# Altium PCB callisto_board.PcbDoc
Units mm, origin at the board's own origin, x right, y up, seen from the top; angles counter-clockwise.
Board outline 152.4 x 101.6 mm, 2 copper layers (Top Layer, Bottom Layer); 126 components, 72 nets, 360 pads, 0 vias.
Unrouted connection lines stored in the file: 262.
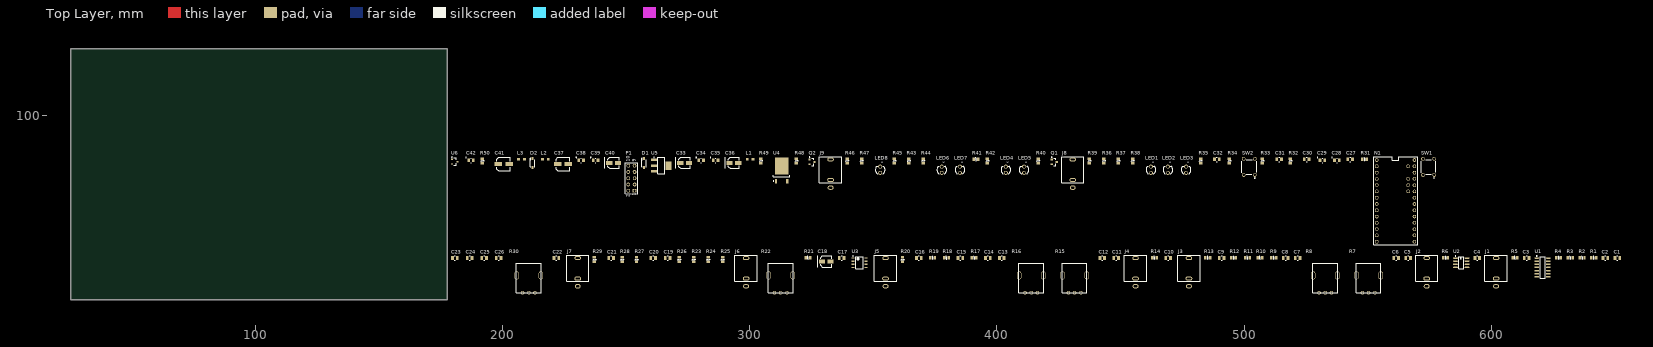
[diagram p0: Top Layer view]
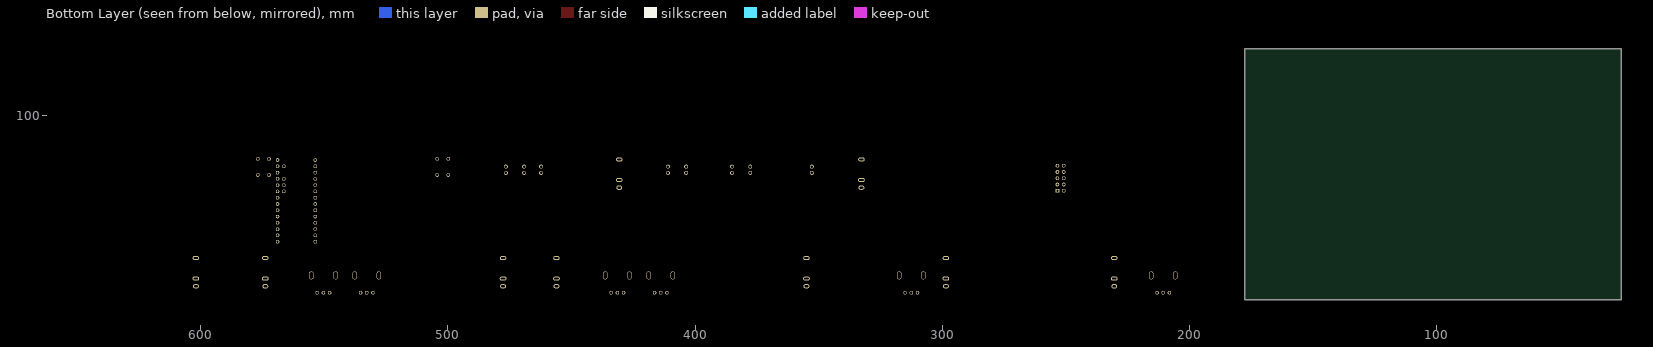
[diagram p1: Bottom Layer view, seen from below]

## Layer stack, top to bottom
Top Solder: solder mask 0.0102, Solder Resist, Dk 3.5
Top Layer: signal copper 0.0356
Dielectric 1: dielectric 0.32, FR-4, Dk 4.8
Bottom Layer: signal copper 0.0356
Bottom Solder: solder mask 0.0102, Solder Resist, Dk 3.5

## Board outline
25.4,25.4 177.8,25.4 177.8,127 25.4,127

## Design rules (kind name [scope] priority, off if disabled: settings)
BoardOutlineClearance [All] p1: gap=0.254 ignorepadtopadclearanceinfootprint=FALSE except(0: Arc-SplitContinuation Track-SplitContinuation SMDPad-SplitContinuation THPad-SplitContinuation Via-SplitContinuation Fill-SplitContinuation Poly-SplitContinuation Region-SplitContinuation Text-SplitContinuation)
Clearance [All] p1: gap=0.18 ignorepadtopadclearanceinfootprint=FALSE
ComponentClearance [All] p1 off: gap=0.254 collisioncheckmode=3 verticalgap=0.254 showdistances=FALSE
HoleSize [All] p1: absolutevalues=TRUE maxlimit=6.3 minlimit=0.3 maxpercent=80.000 minpercent=20.000
MinimumAnnularRing [All] p1: minimumring=0.15
MinimumSolderMaskSliver [All] p1: minsoldermaskwidth=0.15
PlaneConnect [All] p1: planeconnectstyle=Direct reliefexpansion=0.508 reliefentries=4 reliefconductorwidth=0.254 reliefairgap=0.254
PolygonConnect [All] p1: connectstyle=Direct reliefconductorwidth=0.254 reliefentries=4 polygonreliefangle="90 Angle" airgapwidth=0.254
RoomDefinition callisto_schematics_digital [InComponentClass('callisto_schematics_digital')] p1: confinementstyle=ConfineIn formatcopy=TRUE lockcomponents=FALSE outline 178.943,47.371 577.85,47.371 577.85,85.979 178.943,85.979
RoomDefinition callisto_schematics_analog [InComponentClass('callisto_schematics_analog')] p2: confinementstyle=ConfineIn formatcopy=TRUE lockcomponents=FALSE outline 178.943,26.924 652.78,26.924 652.78,46.101 178.943,46.101
RoutingVias [All] p1: holewidth=0.3 width=0.6 viastyle="Through Hole" minholewidth=0.3 minwidth=0.6 maxholewidth=0.3 maxwidth=0.6
SilkToSilkClearance [All] p1 off: silktosilkclearance=0.254
SilkToSolderMaskClearance [IsPad] p1 off: minsilkscreentomaskgap=0.254 clearancetoexposedcopper=TRUE
SolderMaskExpansion [All] p1: expansion=0.102
UnConnectedPin [All] p1:
Width [All] p1: maxlimit=1 minlimit=0.15 preferedwidth=0.254
24 further rules are at their usual default settings.

## Classes and differential pairs
component class callisto_schematics_digital: C27 C28 C29 C30 C31 C32 C33 C34 C35 C36 C37 C38 C39 C40 C41 C42 D1 D2 J8 J9 L1 L2 L3 LED1 LED2 LED3 LED4 LED5 LED6 LED7 LED8 N1 P1 Q1 Q2 R31 R32 R33 R34 R35 R36 R37 R38 R39 R40 R41 R42 R43 R44 R45 R46 R47 R48 R49 R50 SW1 SW2 U4 U5 U6
component class callisto_schematics_analog: C1 C2 C3 C4 C5 C6 C7 C8 C9 C10 C11 C12 C13 C14 C15 C16 C17 C18 C19 C20 C21 C22 C23 C24 C25 C26 J1 J2 J3 J4 J5 J6 J7 R1 R2 R3 R4 R5 R6 R7 R8 R9 R10 R11 R12 R13 R14 R15 R16 R17 R18 R19 R20 R21 R22 R23 R24 R25 R26 R27 R28 R29 R30 U1 U2 U3

## Components (designator, comment, footprint, x,y, rotation, side; value= is the part's Value field where it differs from the comment)
C1 "20pF" CAPA_0805 650.875,42.291 r0 top
C2 "20pF" CAPA_0805 646.049,42.291 r0 top
C3 "100nF" CAPA_0805 614.172,42.291 r0 top
C4 "100nF" CAPA_0805 594.233,42.291 r0 top
C5 "20pF" CAPA_0805 566.293,42.291 r0 top
C6 "20pF" CAPA_0805 561.467,42.291 r0 top
C7 "20pF" CAPA_0805 521.589,42.291 r0 top
C8 "20pF" CAPA_0805 516.763,42.291 r0 top
C9 "100nF" CAPA_0805 490.855,42.291 r0 top
C10 "100nF" CAPA_0805 469.265,42.291 r0 top
C11 "20pF" CAPA_0805 448.183,42.291 r0 top
C12 "20pF" CAPA_0805 442.595,42.291 r0 top
C13 "20pF" CAPA_0805 401.955,42.291 r0 top
C14 "20pF" CAPA_0805 396.367,42.291 r0 top
C15 "1nF" CAPA_0805 385.191,42.291 r0 top
C16 "100nF" CAPA_0805 368.427,42.291 r0 top
C17 "20pF" CAPA_0805 337.185,42.291 r0 top
C18 "EEE-FK1V100UR" PNSC-FK-V-B_V 330.962,40.894 r0 top
C19 "1nF" CAPA_0805 266.827,42.291 r0 top
C20 "20pF" CAPA_0805 260.985,42.291 r0 top
C21 "100nF" CAPA_0805 243.967,42.291 r0 top
C22 "20pF" CAPA_0805 221.869,42.291 r0 top
C23 "100nF" CAPA_0805 180.848,42.291 r0 top
C24 "100nF" CAPA_0805 186.817,42.291 r0 top
C25 "100nF" CAPA_0805 192.659,42.291 r0 top
C26 "100nF" CAPA_0805 198.501,42.291 r0 top
C27 "100nF" CAPA_0805 542.798,82.169 r0 top
C28 "1uF" "CAPA_0805 Pol" 537.464,81.788 r0 top
C29 "1uF" "CAPA_0805 Pol" 531.622,81.788 r0 top
C30 "100nF" CAPA_0805 525.272,82.169 r0 top
C31 "100nF" CAPA_0805 514.096,82.169 r0 top
C32 "100nF" CAPA_0805 488.95,82.169 r0 top
C33 "EEE-FK1V100UR" PNSC-FK-V-B_V 273.685,80.772 r0 top
C34 "1uF" "CAPA_0805 Pol" 280.416,81.788 r0 top
C35 "1uF" "CAPA_0805 Pol" 286.258,81.788 r0 top
C36 "EEE-FK1V100UR" PNSC-FK-V-B_V 293.624,80.772 r0 top
C37 "UUD1C220MCL1GS" NIC-CAPA2-5X5.8_V 224.536,80.264 r0 top
C38 "1uF" "CAPA_0805 Pol" 231.902,81.788 r0 top
C39 "1uF" "CAPA_0805 Pol" 237.744,81.788 r0 top
C40 "EEE-FK1V100UR" PNSC-FK-V-B_V 244.983,80.772 r0 top
C41 "UUD1C220MCL1GS" NIC-CAPA2-5X5.8_V 200.533,80.264 r0 top
C42 "1uF" "CAPA_0805 Pol" 187.325,81.788 r0 top
D1 "1N5819HW-7-F" DIOD-SOD-123-2_V 257.302,80.645 r90 top
D2 "1N5819HW-7-F" DIOD-SOD-123-2_V 212.217,80.645 r90 top
J1 "Phonejack2 TN" Thonkiconn 601.853,37.338 r0 top
J2 "Phonejack2 TN" Thonkiconn 573.786,37.338 r0 top
J3 "Phonejack2 TN" Thonkiconn 477.647,37.338 r0 top
J4 "Phonejack2 TN" Thonkiconn 456.057,37.338 r0 top
J5 "Phonejack2 TN" Thonkiconn 354.965,37.338 r0 top
J6 "Phonejack2 TN" Thonkiconn 298.577,37.338 r0 top
J7 "Phonejack2 TN" Thonkiconn 230.505,37.338 r0 top
J8 "Phonejack2 TN" Thonkiconn 430.657,77.216 r0 top
J9 "Phonejack2 TN" Thonkiconn 332.74,77.216 r0 top
L1 "742792011" SMD-0805 300.228,82.296 r0 top
L2 "742792011" SMD-0805 217.424,82.296 r0 top
L3 "742792011" SMD-0805 207.772,82.296 r0 top
LED1 "WP424YDT" "Type 3mm" 462.28,77.978 r90 top
LED2 "WP424YDT" "Type 3mm" 469.138,77.978 r90 top
LED3 "WP424YDT" "Type 3mm" 476.504,77.978 r90 top
LED4 "WP424YDT" "Type 3mm" 403.606,77.978 r90 top
LED5 "WP424YDT" "Type 3mm" 410.972,77.978 r90 top
LED6 "WP424YDT" "Type 3mm" 377.698,77.978 r90 top
LED7 "WP424YDT" "Type 3mm" 385.064,77.978 r90 top
LED8 "WP424YDT" "Type 3mm" 352.806,77.978 r90 top
N1 "Teensy 3.2" TEENSY_3.0-3.2&LC_DIL+4 561.213,65.405 r0 top
P1 "Header 5X2" HDR2X5 253.492,69.469 r90 top
Q1 "MMBT3904LT1G" ONSC-SOT-23-3-318-08_V 423.164,81.153 r0 top
Q2 "MMBT3904LT1G" ONSC-SOT-23-3-318-08_V 325.247,81.153 r0 top
R1 "33k" RES_0805 641.35,42.418 r0 top
R2 "33k" RES_0805 636.651,42.418 r0 top
R3 "140k" RES_0805 631.825,42.418 r0 top
R4 "200k" RES_0805 627.126,42.418 r0 top
R5 "100k" RES_0805 609.473,42.418 r0 top
R6 "100k" RES_0805 581.406,42.418 r0 top
R7 "Potentiometer" POT-ALPHA 550.291,31.75 r0 top
R8 "Potentiometer" POT-ALPHA 532.765,31.75 r0 top
R9 "33k" RES_0805 511.937,42.418 r0 top
R10 "33k" RES_0805 506.349,42.418 r0 top
R11 "200k" RES_0805 501.269,42.418 r0 top
R12 "200k" RES_0805 495.681,42.418 r0 top
R13 "100k" RES_0805 485.267,42.418 r0 top
R14 "100k" RES_0805 463.677,42.418 r0 top
R15 "Potentiometer" POT-ALPHA 431.419,31.75 r0 top
R16 "Potentiometer" POT-ALPHA 413.893,31.75 r0 top
R17 "33k" RES_0805 390.779,42.418 r0 top
R18 "200k" RES_0805 379.603,42.418 r0 top
R19 "47k" RES_0805 374.015,42.418 r0 top
R20 "100k" RES_0805 361.823,41.656 r90 top
R21 "6k2" RES_0805 323.596,42.418 r0 top
R22 "Potentiometer" POT-ALPHA 312.547,31.75 r0 top
R23 "6k2" RES_0805 277.368,41.656 r90 top
R24 "6k2" RES_0805 283.21,41.656 r90 top
R25 "1k" RES_0805 289.052,41.656 r90 top
R26 "47k" RES_0805 271.526,41.656 r90 top
R27 "33k" RES_0805 254.254,41.656 r90 top
R28 "200k" RES_0805 248.412,41.656 r90 top
R29 "100k" RES_0805 237.236,41.656 r90 top
R30 "Potentiometer" POT-ALPHA 210.693,31.75 r0 top
R31 "120R" RES_0805 548.64,82.296 r0 top
R32 "0R" RES_0805 518.668,81.534 r90 top
R33 "0R" RES_0805 507.365,81.534 r90 top
R34 "120R" RES_0805 494.03,81.534 r90 top
R35 "10k" RES_0805 482.346,81.534 r90 top
R36 "120R" RES_0805 443.23,81.534 r90 top
R37 "120R" RES_0805 449.072,81.534 r90 top
R38 "120R" RES_0805 454.914,81.534 r90 top
R39 "100k" RES_0805 437.388,81.534 r90 top
R40 "1M" RES_0805 416.687,81.534 r90 top
R41 "120R" RES_0805 391.541,82.296 r0 top
R42 "120R" RES_0805 396.113,81.534 r90 top
R43 "120R" RES_0805 364.363,81.534 r90 top
R44 "120R" RES_0805 370.205,81.534 r90 top
R45 "10k" RES_0805 358.521,81.534 r90 top
R46 "100k" RES_0805 339.471,81.534 r90 top
R47 "120R" RES_0805 345.313,81.534 r90 top
R48 "1M" RES_0805 318.897,81.534 r90 top
R49 "0R" RES_0805 304.546,81.534 r90 top
R50 "2k2" RES_0805 191.897,81.534 r90 top
SW1 "TL1105SPF160Q" ESWI-TL1105SPF_V 574.548,79.121 r90 top
SW2 "TL1105SPF160Q" ESWI-TL1105SPF_V 502.031,79.121 r90 top
U1 "MCP6004-E/SL" SOIC-SL14_L 620.649,38.481 r0 top
U2 "MCP6002-E/SN" SOIC-SN8_L 587.756,40.386 r0 top
U3 "TL072ACD" D0008A_L 344.424,40.386 r0 top
U4 "LM1117DTX-3.3" TD03B_N 312.928,77.724 r90 top
U5 "LM1117MP-5.0" MP04A_N 264.287,79.629 r0 top
U6 "LM4040B10IDBZT" DBZ0003A_L 180.721,81.28 r0 top

## Footprints (in the part's own frame and the unit in brackets; to place one, negate y for a bottom-side part, rotate by r counter-clockwise, add the part's x,y. Pads: shape width x height; smd on the part's side, far side on the other; paste and mask are expansions set on the pad)
CAPA_0805 [mm]
  rect 1.1x1.45 smd: 1(-0.95,0) 2(0.95,0)
  silkscreen extent -0.2,-0.9 0.2,0.9, body extent -1.1,-0.72 1.1,0.72, height 0.5
"CAPA_0805 Pol" [mm]
  rect 1.1x1.45 smd: 1(-0.95,0) 2(0.95,0)
  silkscreen extent -2.12,-0.9 0.1,1.32, body extent -1.1,-0.72 1.1,0.72, height 0.5
D0008A_L [mm] "SOIC, 8-Leads, Body 5x4mm, Pitch 1.27mm, IPC High Density"
  rrect18% 1.25x0.55 smd: 1(-2.625,1.905) 2(-2.625,0.635) 3(-2.625,-0.635) 4(-2.625,-1.905) 5(2.625,-1.905) 6(2.625,-0.635) 7(2.625,0.635) 8(2.625,1.905)
  silkscreen extent -2.75,-2.5 1.6,2.85, body extent -3,-2.45 3,2.45, height 1.63
DBZ0003A_L [mm] "SOT23, 3-Leads, Body 3.04x1.4mm, Pitch 0.95mm, IPC High Density"
  rrect18% 0.8x0.55 smd: 1(-1.1,0.95) 2(-1.1,-0.95) 3(1.1,0)
  silkscreen extent -1.22,-1.5 0.7,1.9, body extent -1.26,-1.46 1.26,1.46, height 0.96
DIOD-SOD-123-2_V [mm] "SOD-123, 2-Leads, Body 2.85x1.7mm (max), Pitch 3.7mm"
  rect 1.2x0.7 smd: 1(-1.85,0) 2(1.85,0)
  silkscreen extent -1.43,-0.85 1.97,1.02, body extent -1.42,-0.85 1.43,0.85, height 1.45
ESWI-TL1105SPF_V [mm] "THD, 4-Leads, Body 6x6mm"
  round 1.5 hole 1: 1(-3.25,-2.25) 2(3.25,-2.25) 3(-3.25,2.25) 4(3.25,2.25)
  silkscreen extent -4.67,-3 3,3, body extent -3.95,-3 3.95,3, height 7.4
HDR2X5 [mm] "Connector; Header; 5x2 Position"
  rect 1.5x1.5 hole 0.9: 1(0,0)
  round 1.5 hole 0.9: 2(0,2.54) 3(2.54,0) 4(2.54,2.54) 5(5.08,0) 6(5.08,2.54) 7(7.62,0) 8(7.62,2.54) 9(10.16,0) 10(10.16,2.54)
  silkscreen extent -1.27,-1.27 11.43,3.81
MP04A_N [mm] "SOT223, 4-Leads, Body 6.5x3.5mm, Pitch 2.3mm, Lead Span 7mm, IPC Medium Density"
  rect 2.4x1 smd: 1(-2.9,2.3) 2(-2.9,0) 3(-2.9,-2.3)
  rect 2.4x3.3 smd: 4(2.9,0)
  silkscreen extent -3.02,-3.35 1.4,3.47, body extent -1.86,-3.35 1.86,3.35, height 1.8
NIC-CAPA2-5X5.8_V [mm] "Aluminum Electrolytic Capacitor, Diameter 5mm, Height 6.1mm, Pitch 4.4mm"
  rect 3x1.6 smd: 1(-2.2,0) 2(2.2,0)
  silkscreen extent -2.75,-2.75 2.75,2.75, body extent -2.5,-2.48 2.49,2.5, height 6.1
ONSC-SOT-23-3-318-08_V [mm] "SOT23, 3-Leads, Body 2.92x1.3mm, Pitch 0.95mm"
  rect 0.9x0.8 smd: 1(-1,0.95) 2(-1,-0.95) 3(1,0)
  silkscreen extent -1.12,-1.46 0.65,2.02, body extent -0.65,-1.46 0.65,1.46, height 1.11
PNSC-FK-V-B_V [mm] "CAPAE, 2-Leads, Body 4.50x4.50mm"
  rect 2.5x1.6 smd: 1(-1.75,0) 2(1.75,0)
  silkscreen extent -3.5,-2.25 2.25,2.25, body extent -2.75,-2.25 2.75,2.25, height 6.1
POT-ALPHA [mm] "POT-ALPHA"
  round 1.422 hole 0.9: 1(-2.5,-3.5) 2(0,-3.5) 3(2.5,-3.5)
  oval 1.8x3.2 hole 1.2 slot 2.6 at 90 deg: P$1(-4.9,3.5) P$2(4.9,3.5)
  silkscreen extent -5,-3.5 5,8.5, body extent -5.7,-3.55 5.7,9.1, height 25.3
RES_0805 [mm] "0805 Chip Resistor, 2-Leads, Body 2.05x1.25mm, IPC Medium Density"
  rect 1x1.4 smd: 1(-0.95,0) 2(0.95,0)
  silkscreen extent -0.2,-0.7 0.2,0.7, body extent -1.1,-0.7 1.1,0.7, height 0.5
SMD-0805 [mm] "Chip Inductor, 2-Leads, Body 2.0x1.2mm"
  rect 1.15x1 smd: 1(-1.175,0) 2(1.175,0)
  body extent -1,-0.6 1,0.6, height 0.89
SOIC-SL14_L [mm] "SOIC, 14-Leads, Body 8.7x3.9mm, Pitch 1.27mm, IPC High Density"
  oval 1.9x0.6 smd: 1(-2.35,3.81) 2(-2.35,2.54) 3(-2.35,1.27) 4(-2.35,0) 5(-2.35,-1.27) 6(-2.35,-2.54) 7(-2.35,-3.81) 8(2.35,-3.81) 9(2.35,-2.54) 10(2.35,-1.27) 11(2.35,0) 12(2.35,1.27) 13(2.35,2.54) 14(2.35,3.81)
  silkscreen extent -2.47,-4.4 1,4.78, body extent -2,-4.38 2,4.38, height 1.75
SOIC-SN8_L [mm] "SOIC, 8-Leads, Body 4.9x3.9mm, Pitch 1.27mm, IPC High Density"
  oval 1.9x0.6 smd: 1(-2.35,1.905) 2(-2.35,0.635) 3(-2.35,-0.635) 4(-2.35,-1.905) 5(2.35,-1.905) 6(2.35,-0.635) 7(2.35,0.635) 8(2.35,1.905)
  silkscreen extent -2.47,-2.5 1,2.88, body extent -2,-2.5 2,2.5, height 1.75
TD03B_N [mm] "D-PAK, 4-Leads, Body 6.1x6.6mm, Pitch 2.29mm, Lead Span 9.7mm, IPC Medium Density"
  rect 1.9x0.95 smd: 1(-4.35,2.28) 3(-4.35,-2.28)
  rect 6.9x5.5 smd: 4(1.85,0)
  silkscreen extent -4.47,-3.35 -2,3.43, body extent -2.5,-3.35 3.7,3.35, height 2.38
TEENSY_3.0-3.2&LC_DIL+4 [mil]
  round 57 hole 38: 0(-300,550) 1(-300,450) 2(-300,350) 3(-300,250) 3.3V(300,450) 4(-300,150) 5(-300,50) 6(-300,-50) 7(-300,-150) 8(-300,-250) 9(-300,-350) 10(-300,-450) 11(-300,-550) 12(-300,-650) 13(300,-650) 14/A0(300,-550) 15/A1(300,-450) 16/A2(300,-350) 17/A3(300,-250) 18/A4(300,-150) 19/A5(300,-50) 20/A6(300,50) 21/A7(300,150) 22/A8(300,250) 23/A9(300,350) A10(200,250) A11(200,150) AGND(300,550) AREF(200,350) GND(-300,650) VIN(300,650) VUSB(200,550)
  silkscreen extent -350,-700 350,700
Thonkiconn [mm] "Thonkiconn (PJ301M-12) 3.5mm Mono Jack"
  round 0 hole 3 unplated: 0(0,0)
  oval 2.6x1.6 hole 0.6 slot 1.6 at 0 deg: 1(0,4.92)
  oval 2.7x1.7 hole 0.7 slot 1.7 at 0 deg: 2(0,-3.38)
  oval 2.4x1.7 hole 0.7 slot 1.4 at 0 deg: 5(0,-6.48)
  silkscreen extent -4.5,-4.5 4.5,5.99, body extent -4.5,-6.63 4.5,6, height 14.5
"Type 3mm" [mm] "THT, LED-3mm, 2pin- Body 4.15mm(max)"
  round 1.6 hole 1: 1(1.27,0) 2(-1.27,0)
  silkscreen extent -1.66,-1.95 1.4,1.95, body extent -1.93,-1.94 1.87,1.94, height 10.5

## Part data
C1 C2 C3 C4 C5 C6 C7 C8 C9 C10 C11 C12 C13 C14 C15 C16 C17 C19 C20 C21 C22 C23 C24 C25 C26 C27 C30 C31 C32: library part Cap, "Capacitor", LatestRevisionDate=17-Jul-2002, LatestRevisionNote="Re-released for DXP Platform.", PackageDescription="Radial Cap, Thru-Hole; 2 Leads; 0.3 in Pin Spacing", PackageReference=RAD-0.3, Published=8-Jun-2000, Publisher="Altium Limited"
C18 C33 C36 C40: library part CMP-2000-06211-1, "Aluminum Electrolytic Capacitor, 10 uF, +/- 20%, 35 V, 2-Pin SMD (Size Code B), -55 to 105 degC, RoHS, Tape and Reel", Capacitance=10µF, Case Size/Dimension=Ø4x5.8mm, Lifetime@Temperature=2000Hrs@105°C, Manufacturer=Panasonic, Operating Temp-Max=105°C, Operating Temp Range=-55to+105°C, Package Description="2-Pin Electrolytic Aluminum Capacitor, Body 4.3 x 4.3 mm", Package Reference=FK-V-B, Rated Voltage=35V, Ripple Current=90mA, Datasheet URL=http://industrial.panasonic.com/cdbs/www-data/pdf/RDE0000/ABA0000C1181.pdf, Datasheet Version=03/2016, Impedance=1.35O, Manufacturer URL=http://www.panasonic.com/, Mounting Technology=SurfaceMount, Package URL=http://industrial.panasonic.com/cdbs/www-data/pdf/RDE0000/DME0000COL48.pdf, Series=FK, Type=Can
C28 C29 C34 C35 C38 C39 C42: library part "Cap Pol2", "Polarized Capacitor", Manufacturer="Murata Electronics", PartNumber=GRM21BR61C105KA01L, Mouser=http://www.mouser.de/ProductDetail/Murata-Electronics/GRM21BR61C105KA01L/?qs=sGAEpiMZZMs0AnBnWHyRQHqtMhGnfkOVy3Os4ZS1iuU%3d
C37 C41: library part CMP-0687-00027-1, "Aluminum Electrolytic Capacitor, UD Series, Low Impedance, 22 uF, 16 V, + / - 20%, -55 to 105 degC, Chip Type, 5 x 5.8 mm D x L, Pb-Free, Reel", Manufacturer=Nichicon, Rated Capacitance="22 uF", Rated Ripple Current (at 100kHz)="150 mA", Rated Voltage="16 V", Tolerance Rated Capacitance="-20 to 20%", ComponentLink1Description="Manufacturer URL", ComponentLink1URL=http://www.nichicon.co.jp/, ComponentLink2Description=Datasheet, ComponentLink2URL=http://products.nichicon.co.jp/en/pdf/XJA043/e-ud.pdf, ComponentLink3Description="Package Specification", ComponentLink3URL=http://products.nichicon.co.jp/en/pdf/XJA043/e-ud.pdf, DatasheetVersion=08/2012, Diameter="5 mm", Endurance Time="2000 h", Impedance="0.76 Ohm", Length="5.8 mm", Mounting Technology="Surface Mount", PackageDescription="2-Pin Surface Mount Device, Diameter 5 mm, Height 5.8 mm, Pitch 4.4 mm", PackageReference=CAPAE-D5H5.8, Packing="Dia382mm Reel", PartNumber=UUD1C220MCL1GS, RoHS=TRUE
D1 D2: library part CMP-0303-00003-1, "1.0 A Surface Mount Schottky Barrier Rectifier, 40 V, -65 to 125 degC, 2-Pin SOD-123 Package, RoHS, Tape and Reel", @ Terminal Temperature TT (degC)=90, Forward Voltage Drop VF (V)=0.45, Manufacturer="Diodes Inc", Maximum Average Rectified Current IO (A)=1, Maximum Reverse Current IR (uA)=50, Operating and Storage Temperature Range="-65 to 125 degC", Peak Forward Surge Current IFSM (A)=25, Peak Repetitive Reverse Voltage VRRM (V)=40, @ IF (A)=1, @ VR (V)=40, ComponentLink1Description="Manufacturer URL", ComponentLink1URL=http://www.diodes.com/, ComponentLink2Description=Datasheet, ComponentLink2URL=http://www.diodes.com/datasheets/ds30217.pdf, DatasheetVersion="Rev. 15-2", Mounting Technology="Surface Mount", PackageDescription="2-Pin SOD-123, Body 2.7 x 1.55 mm, Pitch 3.7 mm", PackageReference=SOD-123-2, Packing="Tape and Reel", PartNumber=1N5819HW-7-F, RoHS=TRUE, Total Capacitance CT (pF)=50, VR (RMS) (V)=28
J1 J2 J3 J4 J5 J6 J7 J8 J9: "Jack Socket", Manufacturer="Amphenol Audio", Datasheet=http://www.amphenolaudio.com/wp-content/uploads/2015/07/55010544-001-rev-2.pdf, Mouser=http://www.mouser.de/ProductDetail/Amphenol/ACJM-MV35-2S/?qs=%2fha2pyFaduh8uNgKuHZ7oEtHXwcSE0WAH4R1pjDPuhAHZsUXTeJRNg%3d%3d, Part=ACJM-MV35-2S, Thonk=https://www.thonk.co.uk/shop/3-5mm-jacks/
L1 L2 L3: library part CMP-0220-00043-1, "SMD EMI Suppression Ferrite Bead WE-CBF, Z = 10 Ohm", ComponentLink1Description="Manufacturer Link", ComponentLink1URL=http://www.we-online.com, ComponentLink2Description=Datasheet, ComponentLink2URL=http://www.we-online.de/katalog/media/pdf/742792011.pdf, DatasheetVersion=Dec-2005, Impedance="10 Ohm", PackageDescription="Chip Inductor, 2-Leads, Body 2.0 x 1.2 mm", PackageReference=SMD-0805, PackageVersion=2005
LED1 LED2 LED3 LED4 LED5 LED6 LED7 LED8: library part CMP-1488-00001-1, "THT LED round mono-color color lens, WL-TMRC, Bright Green", Emitting color="Bright Green", Manufacturer=Kingbright, ComponentLink1Description="Manufacturer URL", ComponentLink1URL=http://www.we-online.com, ComponentLink2Description=Datasheet, ComponentLink2URL=http://katalog.we-online.de/pbs/datasheet/7448042001.pdfhttp://katalog.we-online.de/pbs/datasheet/7448042001.pdfhttp://katalog.we-online.de/pbs/datasheet/7448042001.pdfhttp://katalog.we-online.de/pbs/datasheet/151031VS04000.pdf, PackageReference="Type 3mm", PartNumber=WP424YDT
N1: library part TEENSY_3.1-3.2_ALL_PINS, Manufacturer=SparkFun, PartNumber=DEV-13736, Mouser=http://www.mouser.de/ProductDetail/SparkFun/DEV-13736/?qs=sGAEpiMZZMuWWq7rhECaKVjnUlbUDjFgBj37EAXueZA%3d
P1: "Header, 5-Pin, Dual row", LatestRevisionDate=17-Jul-2002, LatestRevisionNote="Re-released for DXP Platform.", Publisher="Altium Limited"
Q1 Q2: library part CMP-1048-00631-1, "General Purpose Transistor, NPN Silicon, 3-Pin SOT-23, Pb-Free, Tape and Reel", Manufacturer="On Semiconductor", ComponentLink1Description="Manufacturer URL", ComponentLink1URL=http://www.onsemi.com/, ComponentLink2Description=Datasheet, ComponentLink2URL=http://www.onsemi.cn/pub_link/Collateral/MMBT3904LT1-D.PDF, ComponentLink3Description="Package Specification", ComponentLink3URL=http://www.onsemi.cn/pub_link/Collateral/318-08.PDF, DatasheetVersion="Rev. 12", fT Min (MHz)=300, IC Continuous (A)=0.2, Mounting Technology="Surface Mount", PackageDescription="3-Pin Small Outline Transistor, Body 2.92 x 1.3 mm, Pitch 0.95 mm", PackageReference=SOT-23-3-318-08, PackageVersion="Rev. AP, 11/2009", Packing="Tape and Reel", PartNumber=MMBT3904LT1G, Polarity=NPN, RoHS=TRUE
R1 R2 R9 R10 R17 R27: library part Resistor, "33k 0805", Manufacturer=Susumu, PartNumber=RR1220P-105-D, Mouser=http://www.mouser.de/ProductDetail/Susumu/RR1220P-105-D/?qs=sGAEpiMZZMu61qfTUdNhG%2fDhcyQpRg8MxiYDTLm9lx4%3d
R3: library part Resistor, "140k 0805", Manufacturer=Susumu, PartNumber=RR1220P-105-D, Mouser=http://www.mouser.de/ProductDetail/Susumu/RR1220P-105-D/?qs=sGAEpiMZZMu61qfTUdNhG%2fDhcyQpRg8MxiYDTLm9lx4%3d
R4 R11 R12 R18 R28: library part Resistor, "200k 0805", Manufacturer=Susumu, PartNumber=RR1220P-105-D, Mouser=http://www.mouser.de/ProductDetail/Susumu/RR1220P-105-D/?qs=sGAEpiMZZMu61qfTUdNhG%2fDhcyQpRg8MxiYDTLm9lx4%3d
R5 R6 R13 R14 R20 R29 R39 R46: library part Resistor, "100k 0805", Manufacturer=Susumu, PartNumber=RR1220P-105-D, Mouser=http://www.mouser.de/ProductDetail/Susumu/RR1220P-105-D/?qs=sGAEpiMZZMu61qfTUdNhG%2fDhcyQpRg8MxiYDTLm9lx4%3d
R7 R8 R15 R16 R22 R30: PartNumber=PTV09A-4020U-B104, Mouser=http://www.mouser.de/Search/ProductDetail.aspx?R=PTV09A-4020U-B104virtualkey65210000virtualkey652-PTV09A4020U-B104
R19 R25 R26: library part Resistor, "1k 0805", Manufacturer=Susumu, PartNumber=RR1220P-105-D, Mouser=http://www.mouser.de/ProductDetail/Susumu/RR1220P-105-D/?qs=sGAEpiMZZMu61qfTUdNhG%2fDhcyQpRg8MxiYDTLm9lx4%3d
R21 R23 R24: library part Resistor, "6k2 0805", Manufacturer=Susumu, PartNumber=RR1220P-105-D, Mouser=http://www.mouser.de/ProductDetail/Susumu/RR1220P-105-D/?qs=sGAEpiMZZMu61qfTUdNhG%2fDhcyQpRg8MxiYDTLm9lx4%3d
R31 R34 R36 R37 R38 R41 R42 R43 R44 R47: library part Resistor, "120R 0805", Manufacturer=Susumu, PartNumber=RR1220P-105-D, Mouser=http://www.mouser.de/ProductDetail/Susumu/RR1220P-105-D/?qs=sGAEpiMZZMu61qfTUdNhG%2fDhcyQpRg8MxiYDTLm9lx4%3d
R32 R33 R49: library part Resistor, "0R 0805", Manufacturer=Susumu, PartNumber=RR1220P-104-D, Mouser=http://www.mouser.de/ProductDetail/Susumu/RR1220P-104-D/?qs=sGAEpiMZZMu61qfTUdNhG%2fDhcyQpRg8MUHr%252b%2fl2FgBo%3d
R35 R45: library part Resistor, "10k 0805", Manufacturer=Susumu, PartNumber=RR1220P-105-D, Mouser=http://www.mouser.de/ProductDetail/Susumu/RR1220P-105-D/?qs=sGAEpiMZZMu61qfTUdNhG%2fDhcyQpRg8MxiYDTLm9lx4%3d
R40 R48: library part Resistor, "1M 0805", Manufacturer=Susumu, PartNumber=RR1220P-105-D, Mouser=http://www.mouser.de/ProductDetail/Susumu/RR1220P-105-D/?qs=sGAEpiMZZMu61qfTUdNhG%2fDhcyQpRg8MxiYDTLm9lx4%3d
R50: library part Resistor, "10k 0805", Manufacturer=Susumu, PartNumber=RR1220P-103-D, Mouser=http://www.mouser.de/ProductDetail/Susumu/RR1220P-103-D/?qs=sGAEpiMZZMu61qfTUdNhG%2fDhcyQpRg8MdkVTtHR2gV4%3d
SW1 SW2: library part CMP-2000-07248-1, "Tact Switch, SPST-NO, 50 mA, 12 VDC, -20 to 70 degC, 4-Pin THD, RoHS, Bulk", Manufacturer=E-Switch, Package Description="4-Pin Through Hole Device, Body 6 x 6 mm", Package Reference=TL1105SPF, Actuation Force=1.6N, Actuator Style=RoundButton, Contact Material=Silver, Datasheet URL=https://www.e-switch.com/system/asset/product_line/data_sheet/140/TL1105.pdf, Datasheet Version=12/2013, Manufacturer URL=http://www.e-switch.ch/en/, Mounting Technology=ThroughHole, Package URL=http://spec_sheets.e-switch.com/specs/P010201.pdf, Size=6x6mm, Termination Style=RightAngle
U1: "1 MHz, Low-Power Operational Amplifier, 14-Pin SOIC, Extended Temperature", Manufacturer="Microchip Technology", PartNumber=MCP6004T-E/SL, Supplier Part Number 1=MCP6004-E/SL-ND, Code_IPC=SOIC127P600-14, Code_JEDEC=MS-012-AB, ComponentLink1Description=Datasheet, ComponentLink1URL=http://ww1.microchip.com/downloads/en/DeviceDoc/21733j.pdf, ComponentLink2Description="Packaging Specification", ComponentLink2URL=http://www.microchip.com/stellent/groups/techpub_sg/documents/packagingspec/en012702.pdf, ComponentLink3Description="Microchip.com Home", ComponentLink3URL=http://www.microchip.com/, DatasheetVersion="revJ, Nov-2009", LatestRevisionDate=02-Dec-2009, LatestRevisionNote="Updated to datasheet revision J, Nov-2009", Mouser=http://www.mouser.de/ProductDetail/Microchip-Technology/MCP6004T-E-SL/?qs=sGAEpiMZZMtCHixnSjNA6N5WMYiF%252b1miedbE5%2f40CfM%3d, PackageDescription="14-Lead Plastic Small Outline (SL) - Narrow, 3.90mm Body [SOIC]", PackageReference=SOIC-SL14, PackageVersion="revBB, Aug-2009", Published=29-Jan-2009, Publisher="Altium Limited", Supplier 1=Digi-Key, Supplier 2=Farnell, Supplier Part Number 2=1332122
U2: library part CMP-0187-00368-2, "1 MHz, Low-Power Operational Amplifier, 8-Pin SOIC, Extended Temperature", Code_IPC=SOIC127P600-8, Code_JEDEC=MS-012, ComponentLink1Description="Manufacturer URL", ComponentLink1URL=http://www.microchip.com/, ComponentLink2Description=Datasheet, ComponentLink2URL=http://ww1.microchip.com/downloads/en/DeviceDoc/21733j.pdf, ComponentLink3Description="Package Specification", ComponentLink3URL=http://www.microchip.com/stellent/groups/techpub_sg/documents/packagingspec/en012702.pdf, DatasheetVersion="revJ, Nov-2009", PackageDescription="8-Lead Plastic Small Outline (SN) - Narrow, 3.90mm Body [SOIC]", PackageReference=SOIC-SN8, PackageVersion="revBB, Aug-2009", RevisionNote="URLs added."
U3: library part CMP-0015-00092-2, "Low-Noise JFET-Input Operational Amplifier, 7 to 36 V, 0 to 70 degC, 8-pin SOIC (D8), Green (RoHS & no Sb/Br)", Manufacturer="Texas Instruments", Rating=Catalog, Total Supply Voltage(Max)(+5V is 5, +/-5V is 10)=36, Total Supply Voltage(Min)(+5V is 5, +/-5V is 10)=7, CMRR(Min)(dB)=75, Code_JEDEC=MS-012, ComponentLink1Description="Manufacturer URL", ComponentLink1URL=http://www.ti.com/, ComponentLink2Description=Datasheet, ComponentLink2URL=http://www.ti.com/lit/ds/symlink/tl072a.pdf, ComponentLink3Description="Package Specification", ComponentLink3URL=http://www.ti.com/litv/pdf/msoi002j, DatasheetVersion=SLOS080J, Eco-Plan="Green (RoHS & no Sb/Br)", GBW(Typ)(MHz)=3, IIB(Max)(pA)=200, Iq per channel(Max)(mA)=2.5, Mounting Technology="Surface Mount", Number of Channels=2, Offset Drift(Typ)(uV/C)=18, PackageDescription="8-Pin Plastic Small Outline, Body 4.9 x 3.9 mm, Pitch 1.27 mm", PackageReference=D0008A, PackageVersion="4040047-3/M, 06/2011", PartNumber=TL072ACD, Slew Rate(Typ)(V/us)=13, Sub Family="General Purpose Amplifier, High Supply Voltage Amplifier (>=30V)", Vio (25C)(Max)(mV)=6, Vn at 1kHz(Typ)(nV/rtHz)=18
U4: library part CMP-0062-00706-2, "800mA Low-Dropout Linear Regulator, 3-pin TO-252", Manufacturer="National Semiconductor", PackageTopMarking=NSUZXYTT*LM1117*DT-3.3, PowerWise=N, Code_JEDEC=TO-252-AA, ComponentLink1Description="LM1117 Datasheet", ComponentLink1URL=http://www.national.com/ds/LM/LM1117.pdf, ComponentLink2Description="LM1117 Web Page", ComponentLink2URL=http://www.national.com/pf/LM/LM1117.html, ComponentLink3Description="TD03B Package Page", ComponentLink3URL=http://www.national.com/packaging/folders/td03b.html, CompType="LDO IC", DatasheetVersion=Apr-2006, PackageDescription="TO252, Molded, Jedec, 6.8 x 6.10 x 2.30mm Body, 3 Lead, 2.28mm Pitch, Surface Mount", PackageReference=TD03B, PackageVersion="revD, Feb-2009", PinCount=3, RevisionNote="Component URLs added", RoHS=N
U5: library part CMP-0062-01640-3, "800mA Low-Dropout Linear Regulator, 4-pin SOT-223", Manufacturer="National Semiconductor", PackageTopMarking=XYTT*N06A, PowerWise=N, Code_IPC=SOT223-4, Code_JEDEC=TO-261-AA, ComponentLink1Description="Manufacturer URL", ComponentLink1URL=http://www.national.com/, ComponentLink2Description="LM1117 Datasheet", ComponentLink2URL=http://www.national.com/ds/LM/LM1117.pdf, ComponentLink3Description="LM1117 Web Page", ComponentLink3URL=http://www.national.com/pf/LM/LM1117.html, ComponentLink4Description="MP04A Package Page", ComponentLink4URL=http://www.national.com/packaging/folders/mp04a.html, CompType="LDO IC", DatasheetVersion=Apr-2006, High-Reliability=Y, PackageDescription="Molded SOT-223, 6.50 x 3.56 x 1.6mm Body, 4 Lead, 2.3mm Pitch", PackageReference=MP04A, PackageVersion="revB, Apr-2003", PartNumber=LM1117MP-5.0, PinCount=4, RevisionNote="SCH symbol layout adjusted", RoHS=N
U6: library part CMP-0366-01043-2, "Precision Micropower Shunt Voltage Reference, 0.2% Accuracy, 10 V, 15 ppm / degC, 15 mA, -40 to 85 degC, 3-pin SOT-23 (DBZ), Green (RoHS & no Sb/Br)", Manufacturer="Texas Instruments", Rating=Catalog, Temp Coeff(Max)(ppm/ degree C)=100, Temp Coeff(Typ)(ppm/ degree C)=15, Code_JEDEC=TO-236, ComponentLink1Description="Manufacturer URL", ComponentLink1URL=http://www.ti.com/, ComponentLink2Description=Datasheet, ComponentLink2URL=http://www.ti.com/general/docs/lit/getliterature.tsp?genericPartNumber=LM4040B10&fileType=pdf, ComponentLink3Description="Package Specification", ComponentLink3URL=http://www.ti.com/litv/pdf/mpds108a, ComponentLink4Description="URL Link1", ComponentLink4URL="Samples URL:http://www.ti.com/product/lm4040b10", DatasheetVersion=SLOS456K, Eco-Plan="Green (RoHS & no Sb/Br)", Initial Accuracy @ 25/deg C(%)=0.2, Iout/Iz(Max)(mA)=15, Min Iz for Regulation(uA)=100, Mounting Technology="Surface Mount", PackageDescription="3-Pin Plastic Small Outline, Body 2.92 x 1.3 mm, Pitch 0.95 mm", PackageReference=DBZ0003A, PackageVersion=4203227/B, PartNumber=LM4040B10IDBZT, SubFamily="Shunt Voltage Reference", VO(V)=10

## Nets (pads, with @x,y where several pads share a name; then routed paths per layer and width w, separated by ;. In a path a pad name is that pad's centre, name@x,y a point inside that pad or via, vN(x,y) a via of type N, cw(c..) or ccw(c..) an arc to the next point about the centre after c; other vN are vias at no path point)
3V3: C29.1 C30.1 N1.3.3V R35.1 R45.1 R49.2
3V3A: C23.1 C24.1 C35.1 C36.1 R7.3 R8.3 R15.3 R16.3 R22.3 R30.3 R32.2 R49.1 U1.4 U2.8 U4.4
5V: C28.1 C39.1 C40.1 L1.1 N1.VIN U5.2 U5.4
ACCENT: N1.12 Q2.3 R45.2
AREF_-10: C42.2 R3.2 R4.2 R11.2 R12.2 R18.2 R28.2 R50.1 U6.2
CV_A: C1.2 N1.14/A0 R1.1 U1.1
CV_B: C7.2 N1.16/A2 R9.1 U1.7
CV_C: C13.2 N1.18/A4 R17.1 U1.8
CV_D: C20.2 N1.20/A6 R27.1 U1.14
CV_E: C2.2 N1.22/A8 R2.1 U2.1
CV_F: C8.2 N1.A10 R10.1 U2.7
DAC: R23.2
GND: C3.2 C4.2 C5.1 C6.1 C9.2 C10.2 C11.1 C12.1 C16.2 C17.1 C19.1 C21.2 C22.1 C23.2 C24.2 C25.2 C26.2 C27.2 C28.2 C29.2 C30.2 C32.2 C33.2 C34.2 C35.2 C36.2 C37.2 C38.2 C39.2 C40.2 C41.1 C42.1 J1.2 J1.5 J2.2 J2.5 J3.2 J3.5 J4.2 J4.5 J5.2 J5.5 J6.5 J7.2 J7.5 J8.2 J8.5 J9.2 J9.5 N1.GND P1.3 P1.4 P1.5 P1.6 P1.7 P1.8 Q1.2 Q2.2 R7.1 R8.1 R15.1 R16.1 R22.1 R26.2 R30.1 R33.2 R36.1 R37.1 R38.1 R40.2 R41.1 R42.1 R43.1 R44.1 R47.1 R48.2 SW1.1 SW1.2 SW2.1 SW2.2 U1.3 U1.5 U1.10 U1.11 U1.12 U2.3 U2.4 U2.5 U3.5 U4.1 U5.1 U6.1
LED_A: LED2.2 N1.0
LED_B: LED4.2 N1.1
LED_C: LED6.2 N1.2
LED_D: LED3.2 N1.3
LED_E: LED5.2 N1.4
LED_F: LED7.2 N1.5
LED_G: LED8.2 N1.6
NetC1_1: C1.1 R1.2 R3.1 R5.1 U1.2
NetC2_1: C2.1 R2.2 R4.1 R6.1 U2.2
NetC5_2: C5.2 J1.1 R5.2
NetC6_2: C6.2 J2.1 R6.2
NetC7_1: C7.1 R9.2 R11.1 R13.1 U1.6
NetC8_1: C8.1 R10.2 R12.1 R14.1 U2.6
NetC11_2: C11.2 J3.1 R13.2
NetC12_2: C12.2 J4.1 R14.2
NetC13_1: C13.1 R17.2 R18.1 R20.1 U1.9
NetC14_1: C14.1 R19.2 R21.1 U3.6
NetC14_2: C14.2 R19.1 R25.2 U3.7
NetC15_1: C15.1 R23.1 R24.2
NetC15_2: C15.2 C18.1 U3.1 U3.2
NetC17_2: C17.2 J5.1 R20.2
NetC18_2: C18.2 R21.2 R26.1
NetC19_2: C19.2 R24.1 U3.3
NetC20_1: C20.1 R27.2 R28.1 R29.1 U1.13
NetC22_2: C22.2 J7.1 R29.2
NetC31_1: C31.1 N1.AREF R32.1
NetC31_2: C31.2 N1.AGND R33.1
NetC33_1: C33.1 C34.1 L1.2 U4.3
NetD1_1: D1.1 P1.1 P1.2
NetD1_2: D1.2 L2.1
NetD2_1: D2.1 L3.1
NetD2_2: D2.2 P1.9 P1.10
NetJ8_1: J8.1 R39.2
NetJ9_1: J9.1 R46.2
NetLED1_1: LED1.1 R36.2
NetLED2_1: LED2.1 R37.2
NetLED3_1: LED3.1 R38.2
NetLED4_1: LED4.1 R41.2
NetLED5_1: LED5.1 R42.2
NetLED6_1: LED6.1 R43.2
NetLED7_1: LED7.1 R44.2
NetLED8_1: LED8.1 R47.2
NetQ1_1: Q1.1 R39.1 R40.1
NetQ2_1: Q2.1 R46.1 R48.1
NetR31_2: R31.2 SW1.3 SW1.4
NetR34_2: R34.2 SW2.3 SW2.4
OUTPUT: J6.1 R25.1
POT_A: C3.1 N1.15/A1 R7.2
POT_B: C9.1 N1.17/A3 R15.2
POT_C: C16.1 N1.19/A5 R22.2
POT_D: C21.1 N1.21/A7 R30.2
POT_E: C4.1 N1.23/A9 R8.2
POT_F: C10.1 N1.A11 R16.2
SW_A: C27.1 N1.8 R31.1
SW_B: C32.1 N1.9 R34.1
TRIG_LED: LED1.2 N1.10
TRIGGER: N1.11 Q1.3 R35.2
VCC: C25.1 C37.1 C38.1 L2.2 U3.8 U5.3
VEE: C26.1 C41.2 L3.2 R50.2 U3.4
pads on no net: J1.0 J2.0 J3.0 J4.0 J5.0 J6.0 J6.2 J7.0 J8.0 J9.0 N1.7 N1.13 N1.VUSB R7.P$1 R7.P$2 R8.P$1 R8.P$2 R15.P$1 R15.P$2 R16.P$1 R16.P$2 R22.P$1 R22.P$2 R30.P$1 R30.P$2 U6.3

## Text inside footprints (layer, text, board x,y; h text height)
LED1: Top Overlay "K" at 463.55,80.518 h0.76 r90; Mechanical 15 "K" at 463.55,80.518 h0.76 r90
LED2: Top Overlay "K" at 470.408,80.518 h0.76 r90; Mechanical 15 "K" at 470.408,80.518 h0.76 r90
LED3: Top Overlay "K" at 477.774,80.518 h0.76 r90; Mechanical 15 "K" at 477.774,80.518 h0.76 r90
LED4: Top Overlay "K" at 404.876,80.518 h0.76 r90; Mechanical 15 "K" at 404.876,80.518 h0.76 r90
LED5: Top Overlay "K" at 412.242,80.518 h0.76 r90; Mechanical 15 "K" at 412.242,80.518 h0.76 r90
LED6: Top Overlay "K" at 378.968,80.518 h0.76 r90; Mechanical 15 "K" at 378.968,80.518 h0.76 r90
LED7: Top Overlay "K" at 386.334,80.518 h0.76 r90; Mechanical 15 "K" at 386.334,80.518 h0.76 r90
LED8: Top Overlay "K" at 354.076,80.518 h0.76 r90; Mechanical 15 "K" at 354.076,80.518 h0.76 r90
P1: Top Overlay "10" at 251.46,81.153 h1.27 r90; Top Overlay "9" at 254,81.153 h1.27 r90; Top Overlay "1" at 254,67.437 h1.27 r90; Top Overlay "2" at 251.46,66.929 h1.27 r90